# Altium PCB Shy-Mirror-master-revB.PcbDoc
Units mil, origin at the board's own origin, x right, y up, seen from the top; angles counter-clockwise.
Board outline 1430.03 x 2720.03 mil, 2 copper layers (Top Layer, Bottom Layer); 21 components, 18 nets, 141 pads, 50 vias.
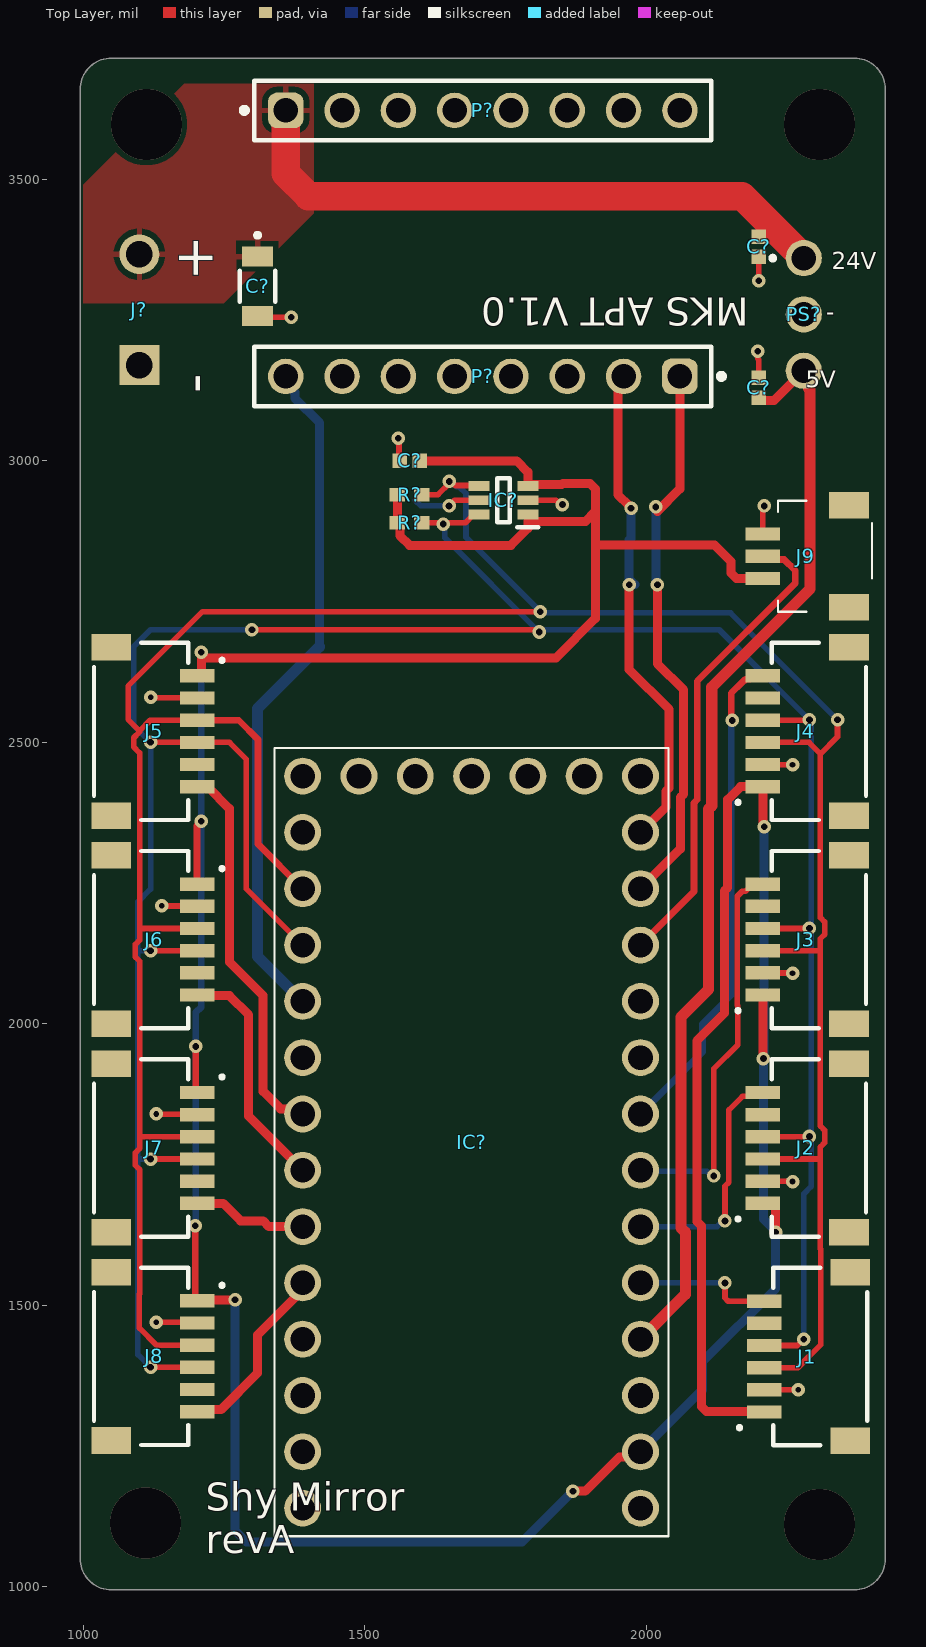
[diagram p0: Top Layer view]
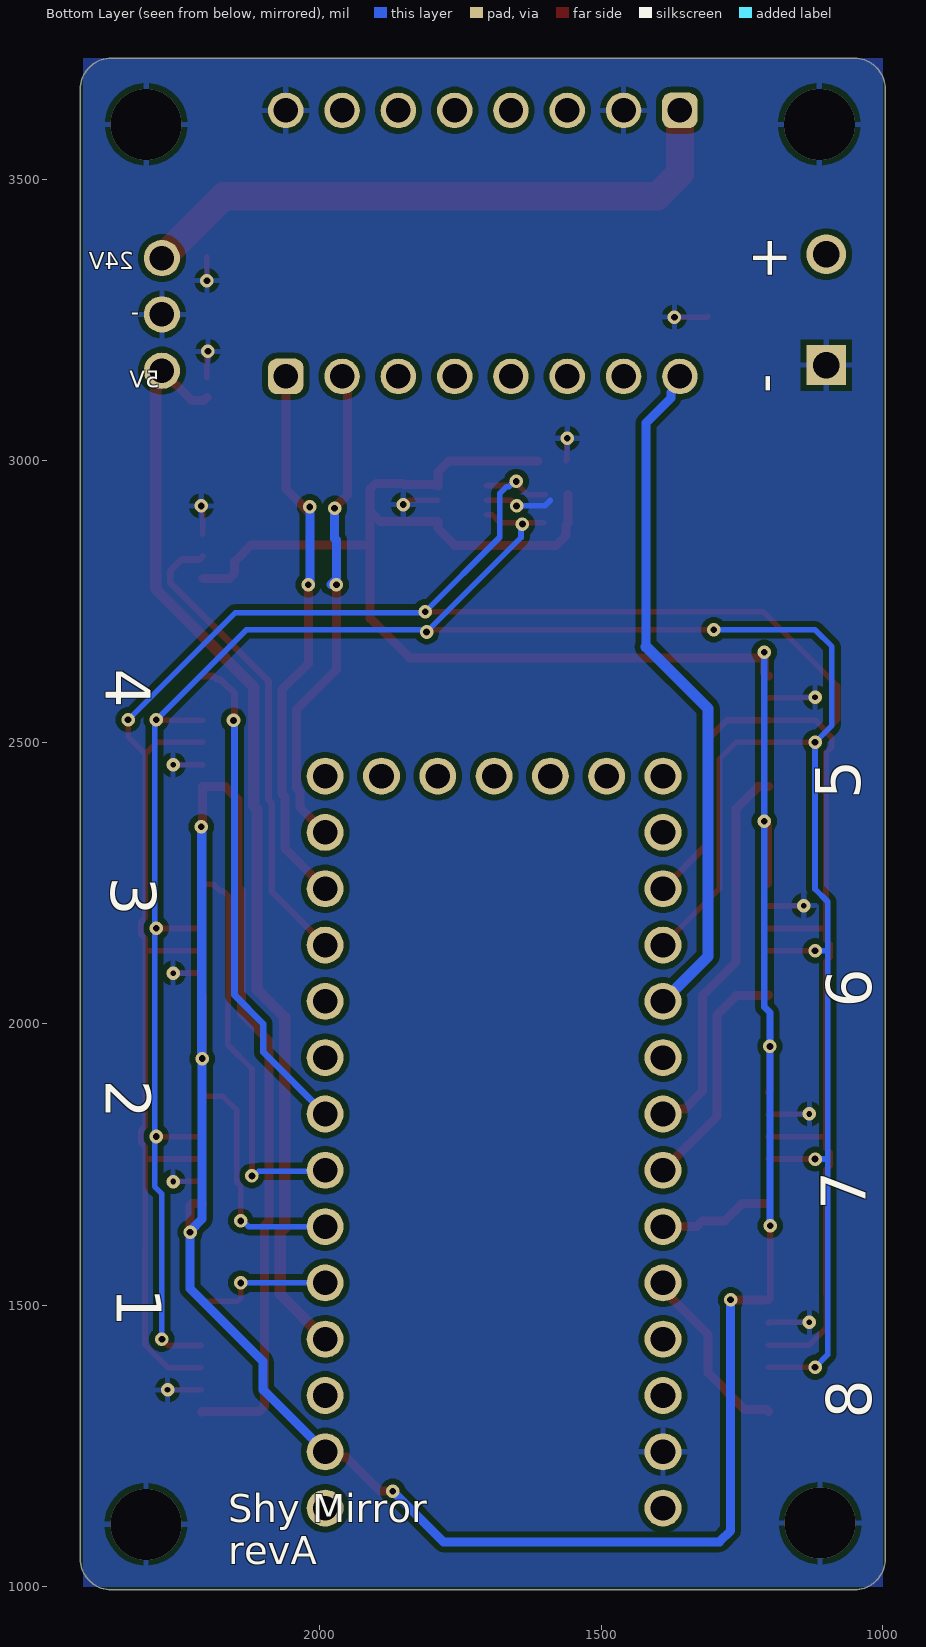
[diagram p1: Bottom Layer view, seen from below]
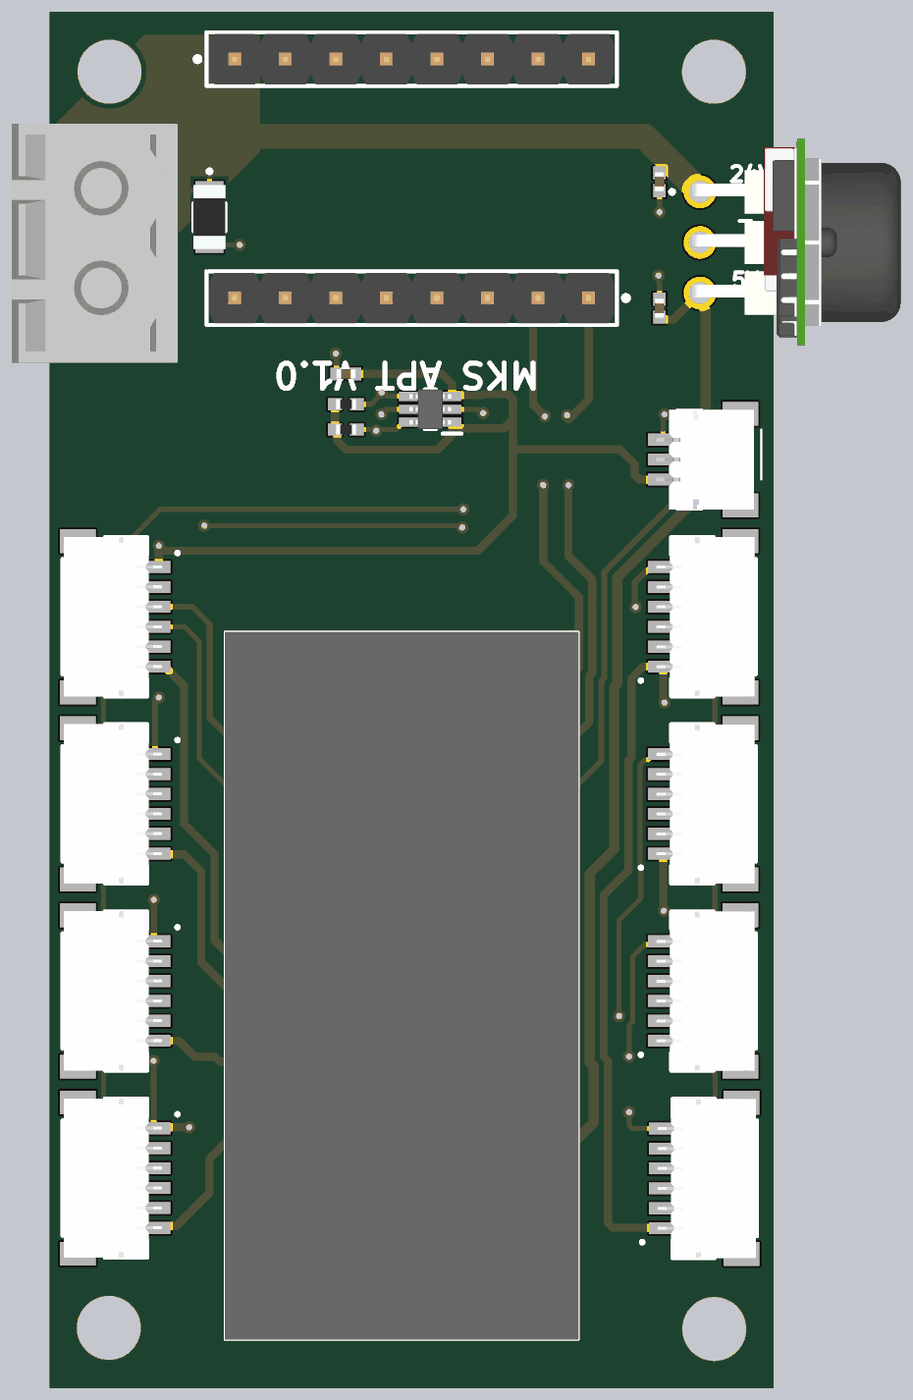
[diagram p2: 3D render of the assembled board from above, using the file's embedded part models]

## Layer stack, top to bottom
Top Solder: solder mask 0.4, Solder Resist, Dk 3.5
Top Layer: signal copper 1.4
Dielectric 1: dielectric 12.6, FR-4, Dk 4.8
Bottom Layer: signal copper 1.4
Bottom Solder: solder mask 0.4, Solder Resist, Dk 3.5

## Board outline
994.99,1050 994.99,3660 cw(c1050,3660) 1050,3715.01 2370,3715.01 cw(c2370,3660) 2425.01,3660 2425.01,1050 cw(c2370,1050) 2370,994.99 1050,994.99 cw(c1050,1050)

## Design rules (kind name [scope] priority, off if disabled: settings)
Clearance [All] p1: gap=10 ignorepadtopadclearanceinfootprint=FALSE except(0: Arc-Hole Track-Hole SMDPad-Hole THPad-Hole Via-Hole Fill-Hole Poly-Hole Region-Hole Text-Hole)
PolygonConnect [All] p1: connectstyle=Relief reliefconductorwidth=10 reliefentries=4 polygonreliefangle="90 Angle" airgapwidth=10
RoutingVias [All] p1: holewidth=28 width=50 viastyle="Through Hole" minholewidth=12 minwidth=24 maxholewidth=12 maxwidth=24
SolderMaskExpansion [All] p1: expansion=4 istentingtop=FALSE
Width [All] p1: maxlimit=50 minlimit=10 preferedwidth=12 minimp=50.000000 maximp=50.000000 favimp=50.000000
30 further rules are at their usual default settings.

## Classes and differential pairs
component class Shy-Mirror-master-revB: C? IC? J1 J2 J3 J4 J5 J6 J7 J8 J9 J? P? PS? R?

## Components (designator, comment, footprint, x,y, rotation, side; value= is the part's Value field where it differs from the comment)
C? "ECPU1C154MA5" ECPU1C154MA5 1310,3310 r270 top
C? "04026W105KAT2A" CAPC1005X56N 2200,3130 r270 top
C? "04026W105KAT2A" CAPC1005X56N 2200,3380 r90 top
C? "04025A240GAT2A" CAPC1005X56N 1580,3000 r0 top
IC? "3800" 3800 1990,1140 r90 top
IC? "LTC4311" SOP65P210X100-6N 1746.69,2930 r180 top
J1 "SM06B-SRSS-TB__LF__SN_" SM06B-SRSS-TB 2225.75,1409.06 r90 top
J2 "SM06B-SRSS-TB__LF__SN_" SM06B-SRSS-TB 2223.19,1779.61 r90 top
J3 "SM06B-SRSS-TB__LF__SN_" SM06B-SRSS-TB 2223.19,2149.61 r90 top
J4 "SM06B-SRSS-TB__LF__SN_" SM06B-SRSS-TB 2223.19,2519.61 r90 top
J5 "SM06B-SRSS-TB__LF__SN_" SM06B-SRSS-TB 1186.81,2519.61 r270 top
J6 "SM06B-SRSS-TB__LF__SN_" SM06B-SRSS-TB 1186.81,2149.61 r270 top
J7 "SM06B-SRSS-TB__LF__SN_" SM06B-SRSS-TB 1186.81,1779.61 r270 top
J8 "SM06B-SRSS-TB__LF__SN_" SM06B-SRSS-TB 1186.81,1409.61 r270 top
J9 "SM03B-SRSS-TB_LF__SN_" SM03BSRSSTBLFSN 2304.37,2830.55 r90 top
J? "796642-2" SHDR2W102P0X500_1X2_1200X835X1230P 1100,3170 r90 top
P? "61300811121" 61300811121 1710,3150 r180 top
P? "61300811121" 61300811121 1710,3622.44 r0 top
PS? "7805SR-C" 7805SRC 2280,3360 r270 top
R? "CPF0402B20R5E1" RESC1005X35N 1580,2890 r0 top
R? "CPF0402B20R5E1" RESC1005X35N 1580,2940 r0 top

## Footprints (in the part's own frame and the unit in brackets; to place one, negate y for a bottom-side part, rotate by r counter-clockwise, add the part's x,y. Pads: shape width x height; smd on the part's side, far side on the other; paste and mask are expansions set on the pad)
3800 [mm]
  round 1.665 hole 1.11: 1(0,0) 2(2.54,0) 3(5.08,0) 4(7.62,0) 5(10.16,0) 6(12.7,0) 7(15.24,0) 8(17.78,0) 9(20.32,0) 10(22.86,0) 11(25.4,0) 12(27.94,0) 13(30.48,0) 14(33.02,0) 15(33.02,2.54) 16(33.02,5.08) 17(33.02,7.62) 18(33.02,10.16) 19(33.02,12.7) 20(33.02,15.24) 21(30.48,15.24) 22(27.94,15.24) 23(25.4,15.24) 24(22.86,15.24) 25(20.32,15.24) 26(17.78,15.24) 27(15.24,15.24) 28(12.7,15.24) 29(10.16,15.24) 30(7.62,15.24) 31(5.08,15.24) 32(2.54,15.24) 33(0,15.24)
  silkscreen extent -1.27,-1.27 34.29,16.51, body extent -1.27,-1.27 34.29,16.51, height 4.3
7805SRC [mm]
  round 1.635 hole 1.11: 1(0,0) 2(2.54,0) 3(5.08,0)
  silkscreen extent -0.1,-1.5 0.1,-1.3, body extent -2.66,-0.41 7.74,10.09, height 22.9
61300811121 [mm] "Pin Header, pitch 2.54 mm, THT, Vertical, single row, 8p"
  rrect50% 1.6x1.6 hole 1.1: 1(-8.89,0)
  round 1.6 hole 1.1: 2(-6.35,0) 3(-3.81,0) 4(-1.27,0) 5(1.27,0) 6(3.81,0) 7(6.35,0) 8(8.89,0)
  silkscreen extent -10.88,-1.35 10.31,1.35, body extent -10.16,-1.27 10.16,1.27, height 8.57
CAPC1005X56N [mm]
  rect 0.65x0.64 smd: 1(-0.45,0) 2(0.45,0)
  body extent -0.5,-0.25 0.5,0.25, height 0.56
ECPU1C154MA5 [mm]
  rect 0.9x1.4 smd: 1(-1.35,0) 2(1.35,0)
  silkscreen extent -2.4,-0.8 0.7,0.8, body extent -1.6,-0.8 1.6,0.8, height 0.8
RESC1005X35N [mm]
  rect 0.7x0.6 smd: 1(-0.55,0) 2(0.55,0)
  body extent -0.5,-0.25 0.5,0.25, height 0.35
SHDR2W102P0X500_1X2_1200X835X1230P [mm]
  rect 1.8x1.8 hole 1.2: 1(0,0)
  round 1.8 hole 1.2: 2(5,0)
  body extent -3.75,-3.75 8.25,4.6, height 12
SM03BSRSSTBLFSN [mm]
  rect 0.6x1.55 smd: 1(-1,2.463) 2(0,2.463) 3(1,2.463)
  rect 1.2x1.8 smd: MP1(-2.3,-1.413) MP2(2.3,-1.413)
  silkscreen extent -2.5,-2.46 2.5,1.79, body extent -2.5,-2.09 2.5,2.86, height 2.96
SM06B-SRSS-TB [mm]
  rect 0.6x1.55 smd: 1(-2.5,0.4) 2(-1.5,0.4) 3(-0.5,0.4) 4(0.5,0.4) 5(1.5,0.4) 6(2.5,0.4)
  rect 1.2x1.8 smd: 7(3.8,-3.475) 8(-3.8,-3.475)
  silkscreen extent -4,-4.25 4,1.59, body extent -4,-4.18 4,0.77, height 2.96
SOP65P210X100-6N [mm]
  rect 0.95x0.45 smd: 1(-1.1,0.65) 2(-1.1,0) 3(-1.1,-0.65) 4(1.1,-0.65) 5(1.1,0) 6(1.1,0.65)
  silkscreen extent -1.58,-1 0.28,1.22, body extent -1.05,-1 1.05,1, height 1

## Part data
C?: "Capacitor", Manufacturer_Name=Panasonic, Datasheet Link=http://industrial.panasonic.com/cdbs/www-data/pdf/RDI0000/ABD0000C178.pdf, Height=1mm, Manufacturer_Part_Number=ECPU1C154MA5
C? C?: "Capacitor", Manufacturer_Name="Kyocera AVX", Mouser Part Number=581-04026W105KAT2A, Datasheet Link=http://www.mouser.com/catalog/supplier/library/pdf/AVXSurfaceMountCeramic.pdf, Height=0.56mm, Manufacturer_Part_Number=04026W105KAT2A, Mouser Price/Stock=https://www.mouser.co.uk/ProductDetail/KYOCERA-AVX/04026W105KAT2A?qs=QKPlp7%252B%252BMySX2WX75ls0%252Bw%3D%3D
C?: "Capacitor", Manufacturer_Name="Kyocera AVX", Mouser Part Number=581-04025A240GAT2A, Datasheet Link=http://www.mouser.com/catalog/supplier/library/pdf/AVXSurfaceMountCeramic.pdf, Height=0.56mm, Manufacturer_Part_Number=04025A240GAT2A, Mouser Price/Stock=https://www.mouser.co.uk/ProductDetail/AVX/04025A240GAT2A?qs=ZBeOGGPQgEEcxmEZelA7Mg%3D%3D
IC?: "Integrated Circuit", Manufacturer_Name=Adafruit, Mouser Part Number=485-3800, Arrow Part Number=3800, Arrow Price/Stock=https://www.arrow.com/en/products/3800/adafruit-industries, Datasheet Link=https://cdn-learn.adafruit.com/downloads/pdf/introducing-adafruit-itsybitsy-m4.pdf, Height=4.2mm, Manufacturer_Part_Number=3800, Mouser Price/Stock=https://www.mouser.co.uk/ProductDetail/Adafruit/3800?qs=%252BEew9%252B0nqrDEEFcTIFoyAg%3D%3D
IC?: "Integrated Circuit", Manufacturer_Name="Analog Devices", Mouser Part Number=N/A, Datasheet Link=http://cds.linear.com/docs/en/datasheet/4311fa.pdf, Height=1mm, Manufacturer_Part_Number=LTC4311, Mouser Price/Stock=https://www.mouser.co.uk/ProductDetail/Analog-Devices/LTC4311?qs=Imq1NPwxi76zvKPfOroLUg%3D%3D
J1 J2 J3 J4 J5 J6 J7 J8: "Connector", Manufacturer_Name="JST (JAPAN SOLDERLESS TERMINALS)", Manufacturer_Part_Number="SM06B-SRSS-TB (LF)(SN)", Datasheet Link=http://uk.rs-online.com/web/p/products/5468827
J9: "Connector", Arrow Part Number=SM03B-SRSS-TB(LF)(SN), Manufacturer_Name="JST (JAPAN SOLDERLESS TERMINALS)", Mouser Part Number=306-SM03BSRSSTBLFSNP, Arrow Price/Stock=https://www.arrow.com/en/products/sm03b-srss-tb-lf-sn/jst-manufacturing?region=europe, Datasheet Link=http://www.jst-mfg.com/product/pdf/eng/eSR.pdf, Height=2.9mm, Manufacturer_Part_Number=SM03B-SRSS-TB(LF)(SN), Mouser Price/Stock=https://www.mouser.co.uk/ProductDetail/JST-Commercial/SM03B-SRSS-TBLFSN?qs=cdbOS8ANM9DY%2Fg%2FPQv5Kng%3D%3D
J?: "Connector", Manufacturer_Name="TE Connectivity", Mouser Part Number=571-796642-2, Arrow Part Number=796642-2, Arrow Price/Stock=https://www.arrow.com/en/products/796642-2/te-connectivity?region=nac, Datasheet Link=https://www.te.com/commerce/DocumentDelivery/DDEController?Action=srchrtrv&DocNm=1-773958-1&DocType=Data%20Sheet&DocLang=English&PartCntxt=796642-2&DocFormat=pdf, Height=12.3mm, Manufacturer_Part_Number=796642-2, Mouser Price/Stock=https://www.mouser.co.uk/ProductDetail/TE-Connectivity/796642-2?qs=QSmEGMYP8RQwet%252Bjzuv6gg%3D%3D
P? P?: "WR-PHD Pin Header, THT, Vertical, pitch 2.54mm, 1 Row, 8P", Contact Resistance=20mOhm, Manufacturer="Wurth Elektronik", Operating Temperature Max=105°C, Operating Temperature Min=-40°C, Rated Current=3A, Withstanding Voltage=500V, Working Voltage=250V, Category="Board-to-Board Connectors", ComponentLink1Description="Website Link", ComponentLink1URL=https://www.we-online.com/redexpert/article/61300811121?ad, ComponentLink2Description="Datasheet Link", ComponentLink2URL=https://www.we-online.com/redexpert/spec/61300811121?ad, Gender="Pin Header", Manufacturer Part Number=61300811121, Match Code=WR-PHD, Mount="Through Hole", Number of Pins=8, Number of Rows=1, Orientation=Vertical, Packaging=Bag, Pitch=2.54mm
PS?: "Power Supply", Manufacturer_Name="Murata Electronics", Mouser Part Number=580-7805SR-C, Arrow Part Number=7805SR-C, Arrow Price/Stock=https://www.arrow.com/en/products/7805sr-c/murata-power-solutions?region=nac, Datasheet Link=https://componentsearchengine.com/Datasheets/1/7805SR-C.pdf, Height=19.1mm, Manufacturer_Part_Number=7805SR-C, Mouser Price/Stock=https://www.mouser.co.uk/ProductDetail/Murata-Power-Solutions/7805SR-C?qs=35WhQNrE6p3r8osawIMOlg%3D%3D
R? R?: "Resistor", Manufacturer_Name="TE Connectivity", Datasheet Link=http://www.farnell.com/datasheets/1786775.pdf, Height=0.35mm, Manufacturer_Part_Number=CPF0402B20R5E1

## Via types
v1: diameter 24, hole 12, Top Layer to Bottom Layer, tented both sides, 38 vias
v2: diameter 24, hole 10, Top Layer to Bottom Layer, tented both sides, 8 vias
v3: diameter 125.98, hole 125.98, Top Layer to Bottom Layer, tented both sides, 4 vias

## Nets (pads, with @x,y where several pads share a name; then routed paths per layer and width w, separated by ;. In a path a pad name is that pad's centre, name@x,y a point inside that pad or via, vN(x,y) a via of type N, cw(c..) or ccw(c..) an arc to the next point about the centre after c; other vN are vias at no path point)
3V3: C?.2@1597.72,3000 IC?.1@1790,2904.41 IC?.2@1990,1240 IC?.3@1790,2955.59 J1.1 J2.1 J3.1 J4.1 J5.1 J6.1 J7.1 J8.1 J9.1 R?.1 | length 7535
  Top Layer w12: v1(1199.41,1641.64) 1199.41,1511.18 J8.1 ; v1(1200,1960) 1200,1880.59 J7.1 ; J6.1 1202.56,2352.56 v1(1210,2360)
  Top Layer w16: J5.1 1204.19,2618.03 1210,2623.84 v1@1210,2650 ; J8.1@1210,1510 v1(1270,1510) v1@1271.53,1511.53 ; v1@1210,2662.16 v1(1210,2660) v1@1210,2650 ; R?.1@1558.35,2940 1558.35,2890 1562.7,2885.65 1562.7,2867.3 1580,2850 1760,2850 1790,2880 1790,2892.2 1892.2,2892.2 1910,2910 ; 1611.95,3000 1770,3000 1790,2980 1790,2955.59 1792.41,2958 1850.13,2958 1852.13,2960 1900,2960 1910,2950 1910,2910 ; v1(1870,1170) 1891.81,1170 1952.33,1230.52 1967.11,1230.52 1975.9,1239.31 1975.9,1254.1 IC?.2@1990,1254.1 ; J9.1 2160.15,2791.18 2150.78,2800.55 2150.78,2821.03 2121.03,2850.78 1910,2850.78 ; J2.1 2226.14,1681.18 2229.95,1677.37 v1(2230,1630) v1(2230,1630) ; J3.1 2207.44,1939.38 v1(2208.41,1938.41) ; J1.1 2209.15,1311.48 2107.37,1311.48 2098,1320.86 2098,1641.43 2090,1649.43 2090,1970 2138.93,2018.93 2138.93,2236.21 2144.78,2242.06 2144.78,2398.26 2167.7,2421.18 J4.1 2207.44,2352.56 v1(2210,2350) ; v1@1210,2650 1370,2650 1840,2650 1910,2720 1910,2850.78 ; 1910,2850.78 1910,2910
  Bottom Layer w12: v1@1200,1650 v1(1200,1960) 1200,2020 1210,2030 v1(1210,2360) v1(1210,2660)
  Bottom Layer w16: v1(1270,1510) 1270,1100 1290,1080 1780,1080 v1(1870,1170) ; IC?.2@1990,1240 2100,1350 2100,1400 2230,1530 v1(2230,1630) 2230,1632.16 2208.41,1653.75 v1(2208.41,1938.41) 2209.21,1939.21 2209.21,2349.21 v1(2210,2350)
24V: C?.1@1310,3363.15 C?.2@2200,3397.72 J?.2 P?.1@1360,3622.44 PS?.1 | length 1094.6
  Top Layer w50: P?.1@1360,3622.44 1360,3510 1400,3470 2170,3470 PS?.1
+5: C?.2@2200,3112.28 IC?.4@1990,1440 PS?.3 | length 1960
  Top Layer w16: C?.2@2200,3112.28 2200,3112.09 2204.86,3107.23 2227.23,3107.23 PS?.3
  Top Layer w20: IC?.4@1990,1440 2070,1520 2070,1629.83 2062,1637.83 2062,2012 2110.93,2060.93 2110.93,2381.64 2116.78,2387.49 2116.78,2597.97 2291.03,2772.23 2291.03,3126.1 2288.49,3128.64 2288.49,3151.51 PS?.3
DIR: IC?.12 P?.1@2060,3150 | length 996.5
  Top Layer w16: IC?.12 2060.93,2310.93 2060.93,2402.35 2066.78,2408.2 2066.78,2593.22 2020,2640 v1(2020,2780) ; v1(2017.19,2918.21) 2020,2915.39 2020,2910 2060,2950 P?.1@2060,3150
  Bottom Layer w16: v1(2017.19,2918.21) 2017.19,2782.81 v1(2020,2780)
EN: IC?.24 P?.8@1360,3150 | length 1213.6
  Bottom Layer w16: P?.8@1360,3150 1360,3137.28 1376.02,3121.27 1376.02,3111.33 1420,3067.35 1420,2670
  Bottom Layer w20: IC?.24 1310,2120 1310,2560 1420,2670
GND: C?.1@1562.28,3000 C?.1@2200,3147.72 C?.1@2200,3362.28 C?.2@1310,3256.85 IC?.2@1790,2930 IC?.5@1703.39,2930 IC?.32 J1.2 J2.2 J3.2 J4.2 J5.2 J6.2 J7.2 J8.2 J9.3 J?.1 P?.2@1460,3622.44 P?.8@2060,3622.44 PS?.2 | length 939.2
  Top Layer w10: v2(1120,2580) 1120.67,2579.33 1201.89,2579.33 J5.2 ; v2(1130,1470) 1201.22,1470 J8.2 ; v2(1130,1840) 1130.67,1839.33 1201.89,1839.33 J7.2 ; v2(1140,2210) 1140.67,2209.33 1201.89,2209.33 J6.2 ; C?.2@1310,3256.85 1311.71,3255.14 v1(1369.77,3255.14) ; v1(1560,3040) 1561.14,3038.86 1561.14,3001.14 C?.1@1562.28,3000 ; v1(1650,2920) 1660,2930 IC?.5@1703.39,2930 ; IC?.2@1790,2930 1839.82,2930 1847.49,2922.34 v1(1851.28,2922.34) ; v1(2198.21,3194.42) 2198.21,3181.79 2200,3180 C?.1@2200,3147.72 ; v1(2200,3320) C?.1@2200,3362.28 ; J9.3 2207.4,2917.4 v1(2210,2920) ; J2.2 2207.72,1720.28 2259.72,1720.28 v2(2260,1720) ; J3.2 2207.72,2090.28 2259.72,2090.28 v2(2260,2090) ; J4.2 2207.72,2460.28 2259.72,2460.28 v2(2260,2460) ; J1.2 v2(2270,1350)
  Bottom Layer w10: 1590,2930 1600,2920 v1(1650,2920)
  other v3: 2308.32,1111.26 1111,1113.35 1112.4,3597.64 2307.83,3597.54
HALL: IC?.11 J9.2 | length 847.1
  Top Layer w12: IC?.11 2084.93,2234.93 2084.93,2392.41 2090.78,2398.26 2090.78,2608.74 2265.03,2783 2265.03,2804.97 2245.26,2824.74 2213.21,2824.74 J9.2
SCL: IC?.6@1703.39,2904.41 IC?.23 J1.4 J2.4 J3.4 J4.4 J5.4 J6.4 J7.4 J8.4 R?.2@1601.65,2890 | length 5244
  Top Layer w10: v1(1120,1390) v1(1120,1390) 1202.52,1389.96 J8.4 ; v1(1120,1760) 1120.43,1760 1120.51,1759.92 J7.4 ; v1(1120,2130) 1202.48,2130 J6.4 ; v1(1120,2500) 1120.43,2500 1120.51,2499.92 J5.4 1260.08,2499.92 1289.71,2470.29 1289.71,2240.29 IC?.23 ; v1(1300,2700) 1810,2700 v1(1810,2696) ; R?.2@1601.65,2890 1679.13,2890 1693.54,2904.41 IC?.6@1703.39,2904.41 ; J2.4 2288.86,1799.29 2289.57,1800 v1(2290,1800) ; J3.4 2289.29,2169.29 v1(2290,2170) ; J4.4 v1@2290,2539.29 ; J1.4 2268.74,1428.74 v1(2280,1440)
  Bottom Layer w10: v1(1120,1390) 1097.43,1412.57 1097.43,1760 ; v1(1120,1760) 1097.43,1760 ; v1(1120,2130) 1097.43,2130 ; v1(1300,2700) 1120,2700 1090,2670 1090,2530 v1(1120,2500) 1120,2239.42 1097.43,2216.85 1097.43,2130 ; v1(1639.63,2887.62) 1642.31,2884.94 1642.31,2863.69 v1(1810,2696) 1810,2700 2130,2700 v1(2290,2540) 2293,2537 2293,1711.12 2280,1698.12 v1(2280,1440) ; 1097.43,1760 1097.43,2130
SDA: IC?.4@1703.39,2955.59 IC?.22 J1.3 J2.3 J3.3 J4.3 J5.3 J6.3 J7.3 J8.3 R?.2@1601.65,2940 | length 5402.5
  Top Layer w10: J8.3 1130.71,1429.29 1100,1460 1100,1519.78 1100.43,1520.22 1100.43,1741.38 1093,1748.82 1093,1771.18 1100.43,1778.62 1100.43,1800 ; J7.3 1101.14,1799.29 1100.43,1800 ; J6.3 1101.14,2169.29 1100.43,2170 ; J5.3 1119.29,2539.29 1100.43,2520.43 ; R?.2@1599.68,2940 1630.43,2940 1650.43,2960 v1(1650.43,2963.31) 1654.22,2963.31 1661.42,2956.11 1702.87,2956.11 IC?.4@1703.39,2955.59 ; v1(1812.09,2732.09) 1212.09,2732.09 1080,2600 1080,2540.87 1100.43,2520.43 ; J2.3 2309.49,1759.92 2309.57,1760 ; J3.3 2309.49,2129.92 2309.57,2130 ; J4.3 2289.21,2499.92 2309.57,2479.57 ; J1.3 2269.37,1389.37 2310,1430 2310,1599.73 2309.57,1600.16 2309.57,1760 ; v1(2340,2540) 2340,2510 2309.57,2479.57 ; 1100.43,1800 1100.43,2111.38 1093,2118.82 1093,2141.18 1100.43,2148.62 1100.43,2170 ; 1100.43,2170 1100.43,2481.38 1090,2491.82 1090,2508.18 1100.43,2518.62 1100.43,2520.43 ; 2309.57,1760 2309.57,1781.38 2317,1788.82 2317,1811.18 2309.57,1818.62 2309.57,2130 ; 2309.57,2130 2309.57,2151.38 2317,2158.82 2317,2181.18 2309.57,2188.62 2309.57,2479.57
  Top Layer w12: J5.3 1276.56,2539.29 1310.71,2505.14 1310.71,2319.29 IC?.22
  Bottom Layer w10: v1(1650.43,2963.31) 1654.22,2963.31 1663.58,2953.95 1668.05,2953.95 1680,2942 1680,2864.18 v1(1812.09,2732.09) 1814.18,2730 2150,2730 v1(2340,2540)
STEP: IC?.13 P?.2@1960,3150 | length 929.6
  Top Layer w16: P?.2@1960,3150 1960,3170 1950,3160 1950,2940 1970,2920 1970,2919.2 v1(1973.28,2915.92) ; v1(1970,2780) 1970,2629.37 2040.78,2558.6 2040.78,2418.97 2034.93,2413.12 2034.93,2384.93 IC?.13
  Bottom Layer w16: v1(1970,2780) 1980,2780 1970,2790 1970,2859.02 1973.28,2862.3 v1(1973.28,2915.92)
XSHT_1: IC?.5@1990,1540 J1.6 | length 249.1
  Top Layer w10: v1(2140,1540) 2140,1513.34 2145.86,1507.48 J1.6
  Bottom Layer w10: IC?.5@1990,1540 v1(2140,1540)
XSHT_2: IC?.6@1990,1640 J2.6 | length 427.3
  Top Layer w10: v1(2140,1650) 2140,1711.82 2147,1718.82 2147,1847 2171.22,1871.22 2200.63,1871.22 J2.6
  Bottom Layer w10: IC?.6@1990,1640 2126.21,1640 2136.21,1650 v1(2140,1650)
XSHT_3: IC?.7 J3.6 | length 703.4
  Top Layer w10: v1(2120,1730) 2120,1920 2163,1963 2163,2032.09 2161.93,2033.16 2161.93,2226.69 2170.72,2235.47 2176.18,2235.47 2188.74,2248.03 J3.6
  Bottom Layer w10: IC?.7 1991.87,1738.13 2108.08,1738.13 2116.21,1730 v1(2120,1730)
XSHT_4: IC?.8 J4.6 | length 884.4
  Top Layer w12: v1(2152.82,2539.03) 2151.21,2540.64 2151.21,2587.39 2170.3,2606.47 2174.8,2610.97 2175.9,2610.97 2177.15,2612.22 2182.93,2612.22 2188.74,2618.03 J4.6
  Bottom Layer w12: IC?.8 2100,1950 2100,2000 2151.21,2051.21 2151.21,2537.42 v1(2152.82,2539.03)
XSHT_5: IC?.26 J5.6 | length 687.3
  Top Layer w16: J5.6 1221.26,2421.18 1260,2382.44 1260,2110 1320,2050 1320,1880 1350.85,1849.15 1380.85,1849.15 IC?.26
XSHT_6: IC?.27 J6.6 | length 421.8
  Top Layer w16: J6.6 1203.74,2050 1260,2050 1294,2016 1294,1836 IC?.27
XSHT_7: IC?.28 J7.6 | length 204.5
  Top Layer w16: J7.6 1248.82,1681.18 1280,1650 1320,1650 1330,1640 IC?.28
XSHT_8: IC?.29 J8.6 | length 329.1
  Top Layer w16: J8.6 1206.37,1314.99 1244.99,1314.99 1310,1380 1310,1447.57 1390,1527.57 IC?.29
pads on no net: IC?.1@1990,1140 IC?.3@1990,1340 IC?.9 IC?.10 IC?.14 IC?.15 IC?.16 IC?.17 IC?.18 IC?.19 IC?.20 IC?.21 IC?.25 IC?.30 IC?.31 IC?.33 J1.5 J1.7 J1.8 J2.5 J2.7 J2.8 J3.5 J3.7 J3.8 J4.5 J4.7 J4.8 J5.5 J5.7 J5.8 J6.5 J6.7 J6.8 J7.5 J7.7 J7.8 J8.5 J8.7 J8.8 J9.MP1 J9.MP2 P?.3 P?.4 P?.5 P?.6 P?.7

## Polygon pours and split planes (outlines as drawn)
24V on Top Layer "NONET_L-01_P-001" (solid, pour order 1): 1000,3490 1180,3670 1410,3670 1410,3440 1250,3280 1000,3280 1000,3450
GND on Bottom Layer "NONET_L-01_P-001" (solid, pour order 0): 1000,1000 1000,3715.01 2420,3715.01 2420,1000 1050,1000

## Silkscreen, mask and mechanical layers (free items; w line width, h text height)
Top Overlay:
  text "24V" at 2330.01,3340 h30
  text "+" at 1230,3320.01 h70 r90
  text "MKS APT V1.0" at 2182.19,3290 h50 r180
  text "-" at 2320.01,3250 h30
  text "5V" at 2283.9,3130 h30
  text "-" at 1230,3120.01 h70 r90
  text "Shy Mirror  / revA" at 1217.81,1060 h50
Bottom Overlay:
  text "24V" at 2330.01,3340 h30
  text "+" at 1230,3320.01 h70 r90
  text "-" at 2320.01,3250 h30
  text "5V" at 2283.9,3130 h30
  text "-" at 1230,3120.01 h70 r90
  text "4" at 2380,2631.1 h80 r90
  text "5" at 1040,2398.9 h80 r270
  text "3" at 2370,2261.1 h80 r90
  text "6" at 1020,2028.9 h80 r270
  text "2" at 2380,1901.1 h80 r90
  text "7" at 1030,1668.9 h80 r270
  text "1" at 2360,1531.1 h80 r90
  text "8" at 1020,1298.9 h80 r270
  text "Shy Mirror  / revA" at 2162.19,1040 h50
Mechanical 1:
  rectangle: 992.89,995.24 1111,1113.35
  rectangle: 2307.83,3597.54 2425.94,3715.65
  rectangle: 994.29,3597.64 1112.4,3715.75
Board:
  lines w10: 1270,1000 2370,1000 ccw(c2370,1050) 2420,1050 2420,3660 ccw(c2370,3660) 2370,3710 1050,3710 ccw(c1050,3660) 1000,3660 1000,1050 ccw(c1050,1050) 1050,1000 1280,1000